# Altium PCB 8810.PcbDoc (part 2 of 2)
Units mm, origin at the board's own origin, x right, y up, seen from the top; angles counter-clockwise.
Board outline 295 x 220 mm, 2 copper layers (Top Layer, Bottom Layer); 156 components, 134 nets, 555 pads, 13 vias.
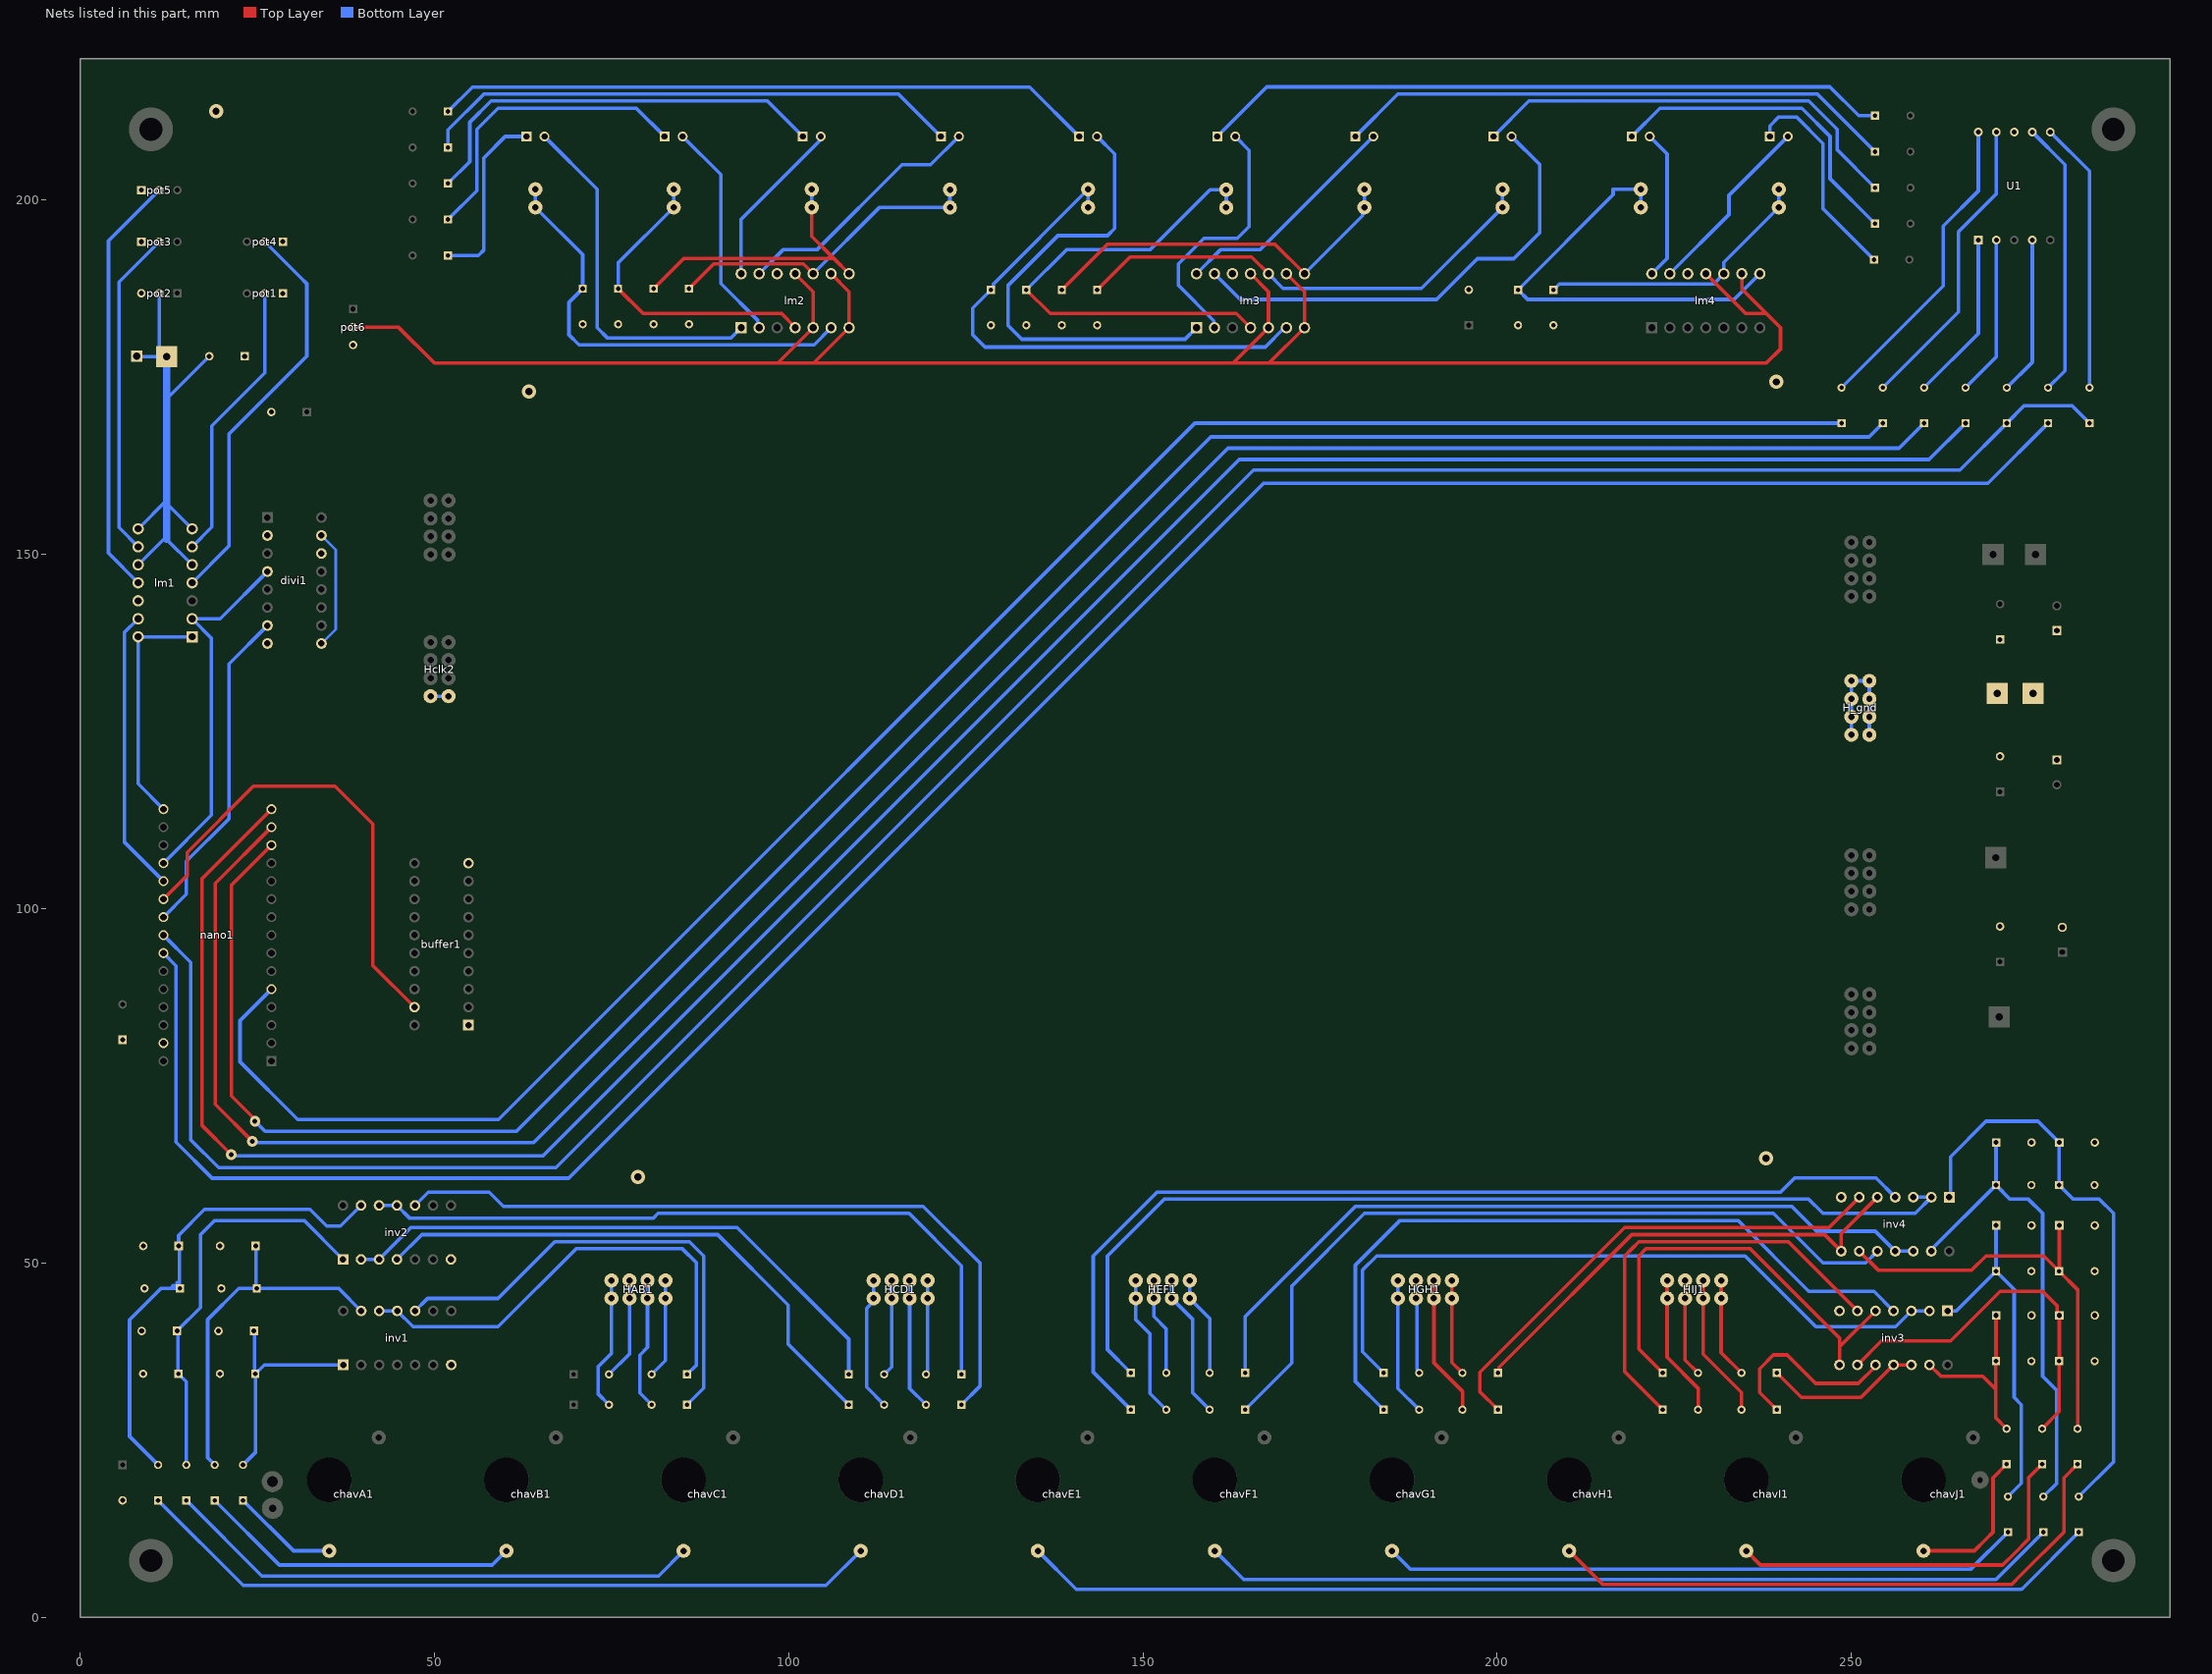
[diagram p2: the nets of this part, all layers, seen from the top]

## Via types
v1: diameter 1.5, hole 0.711, Top Layer to Bottom Layer, 8 vias
v2: diameter 2, hole 1, Top Layer to Bottom Layer, 5 vias

## Nets (pads, with @x,y where several pads share a name; then routed paths per layer and width w, separated by ;. In a path a pad name is that pad's centre, name@x,y a point inside that pad or via, vN(x,y) a via of type N, cw(c..) or ccw(c..) an arc to the next point about the centre after c; other vN are vias at no path point) (continued)
chaveB: inv1.10 R8.1 | length 67.6
  Bottom Layer w0.5: inv1.10@47.292,43.24 49.052,45 59,45 67,53 86,53 88,51 88,32.327 R8.1@85.661,29.988
chaveB/: inv1.11 inv1.12 R6.1 | length 67.4
  Bottom Layer w0.5: inv1.12@42.212,43.24 inv1.11@44.752,43.24 44.76,43.24 47,41 59,41 70,52 85,52 87,50 87,35.618 R6.1@85.661,34.279
chaveC: inv2.4 R12.1 | length 78.4
  Bottom Layer w0.5: inv2.4@44.726,50.501 48.225,54 90,54 99.928,44.072 99.928,38.545 R12.1@108.485,29.988
chaveC/: inv2.2 inv2.3 R10.1 | length 82.2
  Bottom Layer w0.5: inv2.2@39.646,50.501 inv2.3@42.186,50.501 46.685,55 92.731,55 108.485,39.246 R10.1@108.485,34.279
chaveD: inv2.10 R16.1 | length 105.7
  Bottom Layer w0.5: inv2.10@47.266,58.121 49.145,60 57.732,60 59.732,58 119,58 127,50 127,32.603 R16.1@124.385,29.988
chaveD/: inv2.11 inv2.12 R14.1 | length 101.6
  Bottom Layer w0.5: inv2.12@42.186,58.121 inv2.11@44.726,58.121 46.552,56.294 80.86,56.294 81.566,57 117,57 124.385,49.615 R14.1@124.385,34.279
chaveE: inv4.4 R20.1 | length 142.8
  Bottom Layer w0.5: R20.1@148.306,29.29 147.981,29.615 143,34.597 143,51 152,60 240,60 242,62 253.474,62 inv4.4@256.2,59.274
chaveE/: inv4.2 inv4.3 R18.1 | length 141.8
  Bottom Layer w0.5: R18.1@148.306,34.478 145,37.784 145,51 153,59 244,59 246,57 259.006,57 inv4.2@261.28,59.274 inv4.3@258.74,59.274
chaveF: inv4.10 R24.1 | length 110.6
  Bottom Layer w0.5: R24.1@164.425,29.29 171.022,35.887 171.022,46.729 181.293,57 239,57 246,50 252.006,50 inv4.10@253.66,51.654
chaveF/: inv4.11 inv4.12 R22.1 | length 111.3
  Bottom Layer w0.5: R22.1@164.425,34.478 164.425,42.425 180,58 241.598,58 245.105,54.493 253.362,54.493 inv4.11@256.2,51.654 inv4.12@258.74,51.654
chaveG: inv3.4 R28.1 | length 105.9
  Bottom Layer w0.5: R28.1@183.994,29.29 180,33.284 180,49.707 186.293,56 234,56 244,46 253.184,46 inv3.4@255.944,43.24
chaveG/: inv3.2 inv3.3 R26.1 | length 101.7
  Bottom Layer w0.5: R26.1@183.994,34.478 181,37.472 181,49 183,51 235,51 245,41 256.244,41 inv3.3@258.484,43.24 inv3.2@261.024,43.24
chaveH: inv4.6 R32.1 | length 70.1
  Top Layer w0.5: R32.1@200.113,29.29 197.579,31.824 197.579,34.579 218,55 245.962,55 245.982,55.021 246.867,55.021 inv4.6@251.12,59.274
chaveH/: inv4.5 inv4.8 R30.1 | length 67.6
  Top Layer w0.5: R30.1@200.113,34.478 200.259,34.625 200.259,35.259 202,37 219,54 246.234,54 inv4.8@248.58,51.654 248.58,54.194 inv4.5@253.66,59.274
chaveI: inv3.6 R36.1 | length 61.7
  Top Layer w0.5: R36.1@223.372,29.29 218,34.662 218,51 219,52 220,53 241.104,53 inv3.6@250.864,43.24
chaveI/: inv3.5 inv3.8 R34.1 | length 62.8
  Top Layer w0.5: R34.1@223.372,34.478 220,37.85 220,51 221,52 235.727,52 248.324,39.403 248.324,38.16 ; inv3.8@248.324,35.62 248.324,38.16 ; inv3.5@253.404,43.24 248.324,38.16
chaveJ: inv3.10 R40.1 | length 26.8
  Top Layer w0.5: R40.1@239.491,29.29 237.051,31.73 237.051,35.071 239.001,37.02 240.924,37.02 244.944,33 251,33 253.404,35.404 inv3.10@253.404,35.62
chaveJ/: inv3.11 inv3.12 R38.1 | length 22.3
  Top Layer w0.5: R38.1@239.491,34.478 242.943,31.026 251.351,31.026 inv3.11@255.944,35.62 inv3.12@258.484,35.62
gnd: buffer1.1 buffer1.10 C1.1 C2.1 C3.2 C4.1 C5.2 C6.2 C7.2 C8.2 C9.2 C10.2 C11.2 C12.2 C13.2 C14.2 C15.2 C16.2 C17.1 C18.2 C19.1 C20.2 C21.2 divi1.2 divi1.8 divi1.14 H_gnd.C1 H_gnd.C2 H_gnd.C3 H_gnd.C4 H_gnd.C5 H_gnd.C6 H_gnd.C7 H_gnd.C8 inv1.7 inv2.7 inv3.7 inv4.7 lm1.12 lm2.12 lm3.12 lm4.12 nano1.29 pin_gnd1.1 pin_gnd2.1 pot1.1 pot2.3 pot3.1 pot4.1 pot5.1 pot6.3 R1.2 R5.2 R9.2 R13.2 R17.2 R21.2 R25.2 R29.2 R33.2 R37.2 R48.2 R50.2 R52.2 R54.2 R56.2 R58.2 R60.2 R62.2 R64.2 R66.2 U1.8 | length 17.8
  Bottom Layer w0.5: H_gnd.C7@250,124.54 H_gnd.C5@250,127.08 H_gnd.C3@250,129.62 H_gnd.C1@250,132.16 H_gnd.C2@252.54,132.16 H_gnd.C4@252.54,129.62 H_gnd.C6@252.54,127.08 H_gnd.C8@252.54,124.54
  other v2: 78.744,62.144 237.948,64.779 63.36,172.994 239.41,174.362 19.196,212.572
NetC7_1: C7.1 inv1.1 R1.1 R3.2 | length 32.6
  Bottom Layer w0.5: R3.2@23,21.5 24.734,23.234 R1.1@24.734,34.362 ; C7.1@24.531,40.409 24.633,40.308 24.633,34.464 R1.1@24.734,34.362 ; inv1.1@37.132,35.62 25.992,35.62 R1.1@24.734,34.362
NetC8_1: C8.1 inv1.13 R5.1 R7.2 | length 51.8
  Bottom Layer w0.5: R7.2@19,21.5 18,22.5 18,42 22.414,46.414 R5.1@24.931,46.414 ; C8.1@24.763,52.4 24.847,52.316 24.847,46.498 R5.1@24.931,46.414 ; inv1.13@39.672,43.24 36.499,46.414 R5.1@24.931,46.414
NetC9_1: C9.1 inv2.1 R9.1 R11.2 | length 57.6
  Bottom Layer w0.5: R11.2@15,21.5 15,33.25 R9.1@13.888,34.362 13.787,34.464 13.787,40.308 C9.1@13.685,40.409 17,43.724 17,54 19,56 31.607,56 inv2.1@37.106,50.501
NetC10_1: C10.1 inv2.13 R13.1 R15.2 | length 70.7
  Bottom Layer w0.5: R15.2@11,21.5 6.981,25.519 6.981,41.981 11.414,46.414 12.787,46.414 ; 13.65,47.246 13.761,47.136 13.761,46.739 R13.1@14.086,46.414 ; inv2.13@39.646,58.121 36.732,55.207 34.793,55.207 32.452,57.548 17.548,57.548 13.917,53.917 C10.1@13.917,52.4 14.001,52.316 14.001,46.498 R13.1@14.086,46.414 ; 12.787,46.414 13.229,46.856 13.643,46.856 R13.1@14.086,46.414 ; 12.787,46.414 R13.1@14.086,46.414
NetC11_1: C11.1 inv4.1 R17.1 R19.2 | length 81.8
  Bottom Layer w0.5: inv4.1@263.82,59.274 264,59.454 264,65 269,70 276.354,70 C11.1@279.354,67 279.341,66.987 279.341,61.012 R17.1@279.329,61 281.329,59 285,59 287,57 287,21.914 R19.2@282.104,17.018
NetC12_1: C12.1 inv4.13 R21.1 R23.2 | length 69
  Bottom Layer w0.5: inv4.13@261.28,51.654 261.28,51.872 R21.1@270.409,61 ; C12.1@270.434,67 270.421,66.987 270.421,61.012 R21.1@270.409,61 ; R23.2@277.1,17.018 279,18.918 279,32 277,34 277,57 275,59 272.409,59 R21.1@270.409,61
NetC13_1: C13.1 inv3.1 R25.1 R27.2 | length 49.7
  Bottom Layer w0.5: inv3.1@263.564,43.24 264.807,43.24 R25.1@270.409,48.841 ; C13.1@270.434,55.307 270.421,55.294 270.421,48.854 R25.1@270.409,48.841 ; R27.2@272.095,17.018 274,18.922 274,30 272.976,31.024 272.976,46.274 R25.1@270.409,48.841
NetC14_1: C14.1 inv4.9 R29.1 R31.2 | length 60.8
  Top Layer w0.5: inv4.9@251.12,51.654 253.774,49 267,49 269,51 277.178,51 R29.1@279.337,48.841 ; C14.1@279.362,55.29 279.349,55.278 279.349,48.838 279.337,48.825 281.928,46.234 R31.2@281.928,26.6
NetC15_1: C15.1 inv3.9 R33.1 R35.2 | length 51.8
  Top Layer w0.5: inv3.9@250.864,35.62 254.244,39 264,39 271,46 277,46 279.047,43.953 279.047,42.918 C15.1@279.362,42.603 279.349,42.591 279.349,36.151 R33.1@279.337,36.138 279.337,29.013 R35.2@276.924,26.6
NetC16_1: C16.1 inv3.13 R37.1 R39.2 | length 27.5
  Top Layer w0.5: inv3.13@261.024,35.62 262.644,34 268.533,34 270.409,32.124 ; C16.1@270.434,42.603 270.421,42.591 270.421,36.151 R37.1@270.409,36.138 270.409,32.124 ; R39.2@271.919,26.6 270.409,28.111 270.409,32.124
NetC17_2: C17.2 lm1.5 lm1.7 lm1.8 lm1.10 pot2.2 probe1.1 probe2.1 | length 69
  Bottom Layer w0.5: lm1.10@8.19,148.54 12.228,152.578 ; lm1.8@8.19,153.62 12.228,157.658 ; probe2.1@8.426,177.87 8.483,177.926 probe1.1@12.228,177.926 11.18,178.974 pot2.2@11.18,186.864 ; 12.228,152.122 lm1.5@15.81,148.54 ; 12.228,157.202 lm1.7@15.81,153.62 ; 12.228,171.978 C17.2@18.23,177.98
  Bottom Layer w1: 12.228,152.122 12.228,152.578 12.228,157.202 12.228,157.658 12.228,171.978 probe1.1@12.228,177.926
NetchavA1_1: chavA1.C2 R3.1 | length 15.1
  Bottom Layer w0.5: R3.1@23,16.5 30.128,9.372 chavA1.C2@35.168,9.372
NetchavB1_1: chavB1.C2 R7.1 | length 45.8
  Bottom Layer w0.5: R7.1@19,16.5 28.128,7.372 58.168,7.372 chavB1.C2@60.168,9.372
NetchavC1_1: chavC1.C2 R11.1 | length 76.1
  Bottom Layer w0.5: R11.1@15,16.5 15.325,16.175 25.673,5.827 81.623,5.827 chavC1.C2@85.168,9.372
NetchavD1_1: chavD1.C2 R15.1 | length 106.2
  Bottom Layer w0.5: R15.1@11,16.5 23.016,4.484 105.28,4.484 chavD1.C2@110.168,9.372
NetchavE1_1: chavE1.C2 R19.1 | length 152.5
  Bottom Layer w0.5: chavE1.C2@135.168,9.372 140.616,3.924 274.01,3.924 274.46,4.374 R19.1@282.104,12.018
NetchavF1_1: chavF1.C2 R23.1 | length 121.4
  Bottom Layer w0.5: chavF1.C2@160.168,9.372 164.214,5.326 270.408,5.326 R23.1@277.1,12.018
NetchavG1_1: chavG1.C2 R27.1 | length 90.2
  Bottom Layer w0.5: chavG1.C2@185.168,9.372 187.738,6.802 266.88,6.802 R27.1@272.095,12.018
NetchavH1_1: chavH1.C2 R31.1 | length 85.2
  Top Layer w0.5: chavH1.C2@210.168,9.372 214.908,4.632 272.632,4.632 274,6 280,12 280,19.672 R31.1@281.928,21.6
NetchavI1_1: chavI1.C2 R35.1 | length 53.6
  Top Layer w0.5: chavI1.C2@235.168,9.372 237.168,7.372 271.372,7.372 273,9 275,11 275,19.676 R35.1@276.924,21.6
NetchavJ1_1: chavJ1.C2 R39.1 | length 21.3
  Top Layer w0.5: chavJ1.C2@260.168,9.372 267.372,9.372 269,11 270,12 270,19.681 R39.1@271.919,21.6
Netdivi1_9: divi1.9 divi1.15 | length 16.9
  Bottom Layer w0.4: divi1.9@34.063,137.435 36.076,139.448 36.076,150.663 divi1.15@34.063,152.675
NetH_LED1_1: H_LED1.C1 H_LED1.C2 lm2.6 R48.1 | length 62.7
  Bottom Layer w0.5: H_LED1.C1@64.27,201.54 H_LED1.C2@64.27,199 70.939,192.331 R48.1@70.939,187.509 69,185.57 69,181.01 70.416,179.594 103.594,179.594 lm2.6@106,182
NetH_LED2_1: H_LED2.C1 H_LED2.C2 lm2.4 R50.1 | length 44.6
  Top Layer w0.5: R50.1@75.939,187.509 79.448,184 99,184 100.92,182.08 lm2.4@100.92,182
  Bottom Layer w0.5: R50.1@75.939,187.509 75.939,191.169 H_LED2.C2@83.77,199 H_LED2.C1@83.77,201.54
NetH_LED3_1: H_LED3.C1 H_LED3.C2 lm2.8 R52.1 | length 41.3
  Top Layer w0.5: R52.1@80.939,187.509 85.184,191.754 106.406,191.754 ; H_LED3.C2@103.27,199 103.27,194.89 106.406,191.754 ; lm2.8@108.54,189.62 106.406,191.754
  Bottom Layer w0.5: H_LED3.C2@103.27,199 H_LED3.C1@103.27,201.54
NetH_LED4_1: H_LED4.C1 H_LED4.C2 lm2.10 R54.1 | length 45.3
  Top Layer w0.5: R54.1@85.939,187.509 89.43,191 102.08,191 lm2.10@103.46,189.62
  Bottom Layer w0.5: lm2.10@103.46,189.62 112.8,198.96 H_LED4.C2@122.77,198.96 H_LED4.C1@122.77,201.5
NetH_LED5_1: H_LED5.C1 H_LED5.C2 lm3.6 R56.1 | length 75.9
  Bottom Layer w0.5: H_LED5.C2@142.27,199 H_LED5.C1@142.27,201.54 128.884,188.154 128.884,187.682 R56.1@128.559,187.357 126,184.798 126,181 127.727,179.273 167.273,179.273 170,182 lm3.6@170.27,182
NetH_LED6_1: H_LED6.C1 H_LED6.C2 lm3.4 R58.1 | length 70.5
  Top Layer w0.5: R58.1@133.559,187.357 136.916,184 163.19,184 lm3.4@165.19,182
  Bottom Layer w0.5: R58.1@133.559,187.357 139.202,193 151,193 159.5,201.5 H_LED6.C1@161.77,201.5 H_LED6.C2@161.77,198.96
NetH_LED7_1: H_LED7.C1 H_LED7.C2 lm3.8 R60.1 | length 54.1
  Top Layer w0.5: R60.1@138.559,187.357 145,193.798 168.632,193.798 lm3.8@172.81,189.62 ; H_LED7.C2@180.983,198.713 H_LED7.C2@181.27,199
  Bottom Layer w0.5: lm3.8@172.81,189.62 180.983,197.793 H_LED7.C2@180.983,198.713 ; H_LED7.C2@181.27,199 H_LED7.C1@181.27,201.54
NetH_LED8_1: H_LED8.C1 H_LED8.C2 lm3.10 R62.1 | length 68.3
  Top Layer w0.5: R62.1@143.559,187.357 143.884,187.682 148.202,192 165.35,192 lm3.10@167.73,189.62
  Bottom Layer w0.5: lm3.10@167.73,189.62 169.788,187.562 189.332,187.562 H_LED8.C2@200.77,199 H_LED8.C1@200.77,201.54
NetH_LED9_1: H_LED9.C1 H_LED9.C2 lm4.8 R64.1 | length 62.4
  Bottom Layer w0.5: H_LED9.C2@220.27,199 H_LED9.C1@220.27,201.54 216.365,201.54 216.365,200.773 R64.1@202.949,187.357 204.306,186 233.46,186 lm4.8@237.08,189.62
NetH_LED10_1: H_LED10.C1 H_LED10.C2 lm4.10 R66.1 | length 40.1
  Bottom Layer w0.5: R66.1@207.949,187.357 208.783,188.192 230.572,188.192 lm4.10@232,189.62 232,191.23 H_LED10.C2@239.77,199 H_LED10.C1@239.77,201.54
NetHAB1_1: HAB1.C1 HAB1.C2 R4.2 | length 19
  Bottom Layer w0.5: R4.2@74.652,29.988 73.093,31.547 73.093,35.314 75,37.221 HAB1.C1@75,45 HAB1.C2@75,47.54
NetHAB1_3: HAB1.C3 HAB1.C4 R2.2 | length 14.5
  Bottom Layer w0.5: R2.2@74.652,34.279 77.54,37.167 HAB1.C3@77.54,45 HAB1.C4@77.54,47.54
NetHAB1_5: HAB1.C5 HAB1.C6 R8.2 | length 18.7
  Bottom Layer w0.5: HAB1.C6@80.08,47.54 HAB1.C5@80.08,45 80.08,38.08 79,37 79,31.649 R8.2@80.661,29.988
NetHAB1_7: HAB1.C7 HAB1.C8 R6.2 | length 14.1
  Bottom Layer w0.5: R6.2@80.661,34.279 82.62,36.238 HAB1.C7@82.62,45 HAB1.C8@82.62,47.54
NetHCD1_1: HCD1.C1 HCD1.C2 R12.2 | length 19
  Bottom Layer w0.5: HCD1.C2@112,47.54 HCD1.C1@112,45 112,44.594 111,43.594 111,32.473 R12.2@113.485,29.988
NetHCD1_3: HCD1.C3 HCD1.C4 R10.2 | length 13.7
  Bottom Layer w0.5: R10.2@113.485,34.279 114.54,35.334 HCD1.C3@114.54,45 HCD1.C4@114.54,47.54
NetHCD1_5: HCD1.C5 HCD1.C6 R16.2 | length 18.5
  Bottom Layer w0.5: HCD1.C6@117.08,47.54 HCD1.C5@117.08,45 117.08,32.293 R16.2@119.385,29.988
NetHCD1_7: HCD1.C7 HCD1.C8 R14.2 | length 13.4
  Bottom Layer w0.5: R14.2@119.385,34.279 119.385,34.455 119.62,34.69 HCD1.C7@119.62,45 HCD1.C8@119.62,47.54
NetHclk2_7: Hclk2.C7 Hclk2.C8 | length 2.5
  Bottom Layer w0.5: Hclk2.C7@49.46,130 Hclk2.C8@52,130
NetHEF1_1: HEF1.C1 HEF1.C2 R20.2 | length 20
  Bottom Layer w0.5: HEF1.C2@149,47.54 HEF1.C1@149,45 149,42 151,40 151,31.597 R20.2@153.306,29.29
NetHEF1_3: HEF1.C3 HEF1.C4 R18.2 | length 13.8
  Bottom Layer w0.5: HEF1.C4@151.54,47.54 HEF1.C3@151.54,45 151.54,42.46 153.306,40.694 R18.2@153.306,34.478
NetHEF1_5: HEF1.C5 HEF1.C6 R24.2 | length 20.5
  Bottom Layer w0.5: HEF1.C6@154.08,47.54 HEF1.C5@154.08,45 157,42.08 157,31.716 R24.2@159.425,29.29
NetHEF1_7: HEF1.C7 HEF1.C8 R22.2 | length 14.2
  Bottom Layer w0.5: HEF1.C8@156.62,47.54 HEF1.C7@156.62,45 159.425,42.195 R22.2@159.425,34.478
NetHGH1_1: HGH1.C1 HGH1.C2 R28.2 | length 19.5
  Bottom Layer w0.5: HGH1.C2@186,47.54 HGH1.C1@186,45 186,32.284 R28.2@188.994,29.29
NetHGH1_3: HGH1.C3 HGH1.C4 R26.2 | length 13.6
  Bottom Layer w0.5: HGH1.C4@188.54,47.54 HGH1.C3@188.54,45 ; HGH1.C3@188.75,44.79 HGH1.C3@188.54,45 ; R26.2@189,34.484 R26.2@188.994,34.478 188.994,34.654 188.682,34.967 188.682,44.858 HGH1.C3@188.54,45
NetHGH1_5: HGH1.C5 HGH1.C6 R32.2 | length 19.9
  Top Layer w0.5: HGH1.C6@191.08,47.54 HGH1.C5@191.08,45 191.08,35.92 195.113,31.887 R32.2@195.113,29.29
NetHGH1_7: HGH1.C7 HGH1.C8 R30.2 | length 13.7
  Top Layer w0.5: HGH1.C8@193.62,47.54 HGH1.C7@193.62,45 193.62,35.971 R30.2@195.113,34.478
NetHIJ1_1: HIJ1.C1 HIJ1.C2 R36.2 | length 20.1
  Top Layer w0.5: HIJ1.C2@224,47.54 HIJ1.C1@224,45 224,36.698 228.372,32.327 R36.2@228.372,29.29
NetHIJ1_3: HIJ1.C3 HIJ1.C4 R34.2 | length 13.8
  Top Layer w0.5: HIJ1.C4@226.54,47.54 HIJ1.C3@226.54,45 226.54,36.31 R34.2@228.372,34.478
NetHIJ1_5: HIJ1.C5 HIJ1.C6 R40.2 | length 20.5
  Top Layer w0.5: HIJ1.C6@229.08,47.54 HIJ1.C5@229.08,45 229.08,37.129 234.491,31.718 R40.2@234.491,29.29
NetHIJ1_7: HIJ1.C7 HIJ1.C8 R38.2 | length 14.3
  Top Layer w0.5: HIJ1.C8@231.62,47.54 HIJ1.C7@231.62,45 231.62,37.349 R38.2@234.491,34.478
NetLED1_1: LED1.1 R49.1 | length 25.6
  Bottom Layer w0.5: R49.1@51.938,192.206 56.206,192.206 57,193 57,206 60,209 LED1.1@63,209
NetLED1_2: LED1.2 lm2.1 | length 51.6
  Bottom Layer w0.5: LED1.2@65.54,209 73,201.54 73,182 74.467,180.533 91.833,180.533 lm2.1@93.3,182
NetLED2_1: LED2.1 R51.1 | length 43.8
  Bottom Layer w0.5: R51.1@51.938,197.284 56,201.346 56,210 59,213 78.5,213 LED2.1@82.5,209
NetLED2_2: LED2.2 lm2.2 | length 31.5
  Bottom Layer w0.5: LED2.2@85.04,209 90.421,203.619 90.421,188.251 95.66,183.012 95.66,182.18 lm2.2@95.84,182
NetLED3_1: LED3.1 R53.1 | length 60.2
  Bottom Layer w0.5: R53.1@51.938,202.362 55,205.424 55,211 58,214 97,214 LED3.1@102,209
NetLED3_2: LED3.2 lm2.14 | length 24
  Bottom Layer w0.5: lm2.14@93.3,189.62 93.3,197.3 104.368,208.368 104.368,208.828 LED3.2@104.54,209
NetLED4_1: LED4.1 R55.1 | length 76.6
  Bottom Layer w0.5: R55.1@51.938,207.44 51.938,209.938 57,215 115.5,215 LED4.1@121.5,209
NetLED4_2: LED4.2 lm2.13 | length 36.2
  Bottom Layer w0.5: lm2.13@95.84,189.62 99.22,193 104,193 116,205 120.04,205 LED4.2@124.04,209
NetLED5_1: LED5.1 R57.1 | length 93.4
  Bottom Layer w0.5: R57.1@51.938,212.518 55.388,215.968 134.032,215.968 LED5.1@141,209
NetLED5_2: LED5.2 lm3.1 | length 66.1
  Bottom Layer w0.5: LED5.2@143.54,209 146,206.54 146,196 145,195 138,195 131,188 131,182.293 132.914,180.379 155.949,180.379 lm3.1@157.57,182
NetLED6_1: LED6.1 R59.1 | length 97.4
  Bottom Layer w0.5: LED6.1@160.5,209 167.5,216 246.974,216 251.047,211.927 R59.1@253.347,211.927
NetLED6_2: LED6.2 lm3.2 | length 36.8
  Bottom Layer w0.5: lm3.2@160.11,182 160,182.11 160,183 155,188 155,191 158.638,194.638 163.338,194.638 165,196.3 165,207.04 LED6.2@163.04,209
NetLED7_1: LED7.1 R61.1 | length 79.2
  Bottom Layer w0.5: LED7.1@180,209 186,215 245.196,215 R61.1@253.347,206.849
NetLED7_2: LED7.2 lm3.14 | length 33
  Bottom Layer w0.5: lm3.14@157.57,189.62 160.95,193 166.54,193 LED7.2@182.54,209
NetLED8_1: LED8.1 R63.1 | length 62.7
  Bottom Layer w0.5: LED8.1@199.5,209 204.5,214 244,214 248,210 248,207.118 R63.1@253.347,201.771
NetLED8_2: LED8.2 lm3.13 | length 66.5
  Bottom Layer w0.5: lm3.13@160.11,189.62 163.733,185.997 191.482,185.997 197.228,191.743 202.34,191.743 206,195.403 206,205.04 LED8.2@202.04,209
NetLED9_1: LED9.1 R65.1 | length 46.2
  Bottom Layer w0.5: LED9.1@219,209 223,213 243,213 247,209 247,203.04 R65.1@253.347,196.693
NetLED9_2: LED9.2 lm4.14 | length 21.3
  Bottom Layer w0.5: LED9.2@221.54,209 224,206.54 224,191.78 lm4.14@221.84,189.62
NetLED10_1: LED10.1 R67.1 | length 30.4
  Bottom Layer w0.5: LED10.1@238.5,209 238.5,210.5 239.76,211.76 242.24,211.76 246,208 246,198.801 R67.1@253.186,191.615
NetLED10_2: LED10.2 lm4.13 | length 26.3
  Bottom Layer w0.5: lm4.13@224.38,189.62 232.729,197.969 232.729,200.689 LED10.2@241.04,209
Netlm1_4: lm1.4 pot4.2 | length 57.3
  Bottom Layer w0.5: lm1.4@15.81,146 20.99,151.18 20.99,165.99 20.99,166.99 32,178 32,188.223 31,189.223 pot4.2@26.085,194.139
Netlm1_6: lm1.6 pot1.2 | length 40
  Bottom Layer w0.5: lm1.6@15.81,151.08 18.594,153.864 18.594,168.133 26.085,175.624 pot1.2@26.085,186.844
Netlm1_9: lm1.9 pot3.2 | length 46.5
  Bottom Layer w0.5: lm1.9@8.19,151.08 5.48,153.79 5.48,188.438 pot3.2@11.18,194.138
Netlm1_11: lm1.11 pot5.2 | length 60.1
  Bottom Layer w0.5: lm1.11@8.19,146 4,150.19 4,194.253 pot5.2@11.18,201.433
Netlm2_5: lm2.5 lm2.7 lm2.9 lm2.11 lm3.5 lm3.7 lm3.9 lm3.11 lm4.9 lm4.11 pot6.2 | length 291.1
  Top Layer w0.5: pot6.2@38.522,182.102 44.898,182.102 50,177 98.46,177 ; lm2.11@100.92,189.62 103.46,187.08 lm2.5@103.46,182 98.46,177 ; lm2.9@106,189.62 108.54,187.08 lm2.7@108.54,182 103.54,177 ; lm3.11@165.19,189.62 167.73,187.08 lm3.5@167.73,182 162.73,177 ; lm3.9@170.27,189.62 172.81,187.08 lm3.7@172.81,182 167.81,177 ; lm4.11@229.46,189.62 235.08,184 238,184 ; lm4.9@234.54,189.62 234.54,187.46 238,184 ; 98.46,177 103.54,177 ; 103.54,177 162.73,177 ; 162.73,177 167.81,177 ; 167.81,177 238,177 240,179 240,182 238,184
NetR41_2: R41.2 U1.7 | length 39
  Bottom Layer w0.5: U1.7@275.54,209.62 280.147,205.013 280.147,175.912 R41.2@277.774,173.538
NetR42_2: R42.2 U1.6 | length 38.4
  Bottom Layer w0.5: U1.6@278.08,209.62 283.608,204.092 R42.2@283.608,173.538
NetR43_2: R43.2 U1.4 | length 22.3
  Bottom Layer w0.5: R43.2@271.941,173.538 275.54,177.138 U1.4@275.54,194.38
NetR44_2: R44.2 U1.2 | length 22.6
  Bottom Layer w0.5: R44.2@266.107,173.538 270.46,177.891 U1.2@270.46,194.38
NetR45_2: R45.2 U1.1 | length 24
  Bottom Layer w0.5: R45.2@260.274,173.538 267.92,181.184 U1.1@267.92,194.38
NetR46_2: R46.2 U1.9 | length 42.7
  Bottom Layer w0.5: R46.2@254.441,173.538 265.127,184.225 265.127,195.546 270.46,200.879 U1.9@270.46,209.62
NetR47_2: R47.2 U1.10 | length 44.1
  Bottom Layer w0.5: R47.2@248.607,173.538 262.97,187.901 262.97,196.345 267.92,201.295 U1.10@267.92,209.62
Oe: buffer1.19 nano1.21 | length 68.5
  Top Layer w0.5: nano1.21@11.765,101.35 15.134,104.719 15.134,107.96 24.456,117.282 35.998,117.282 41.337,111.942 41.337,91.963 buffer1.19@47.19,86.11
pin_F: lm1.1 lm1.14 nano1.16 | length 33.4
  Bottom Layer w0.5: nano1.16@11.765,114.05 8.19,117.625 lm1.14@8.19,138.38 lm1.1@15.81,138.38
pin_Freq: divi1.7 nano1.22 | length 47.2
  Bottom Layer w0.5: nano1.22@11.765,98.81 15,102.045 15,106.699 21,112.699 21,134.532 divi1.7@26.443,139.975
pin_High: divi1.4 lm1.2 nano1.19 | length 51.8
  Bottom Layer w0.5: nano1.19@11.765,106.43 18.536,113.201 18.536,138.194 lm1.2@15.81,140.92 19.768,140.92 divi1.4@26.443,147.595
pin_Low: lm1.13 nano1.20 | length 40.1
  Bottom Layer w0.5: lm1.13@8.19,140.92 6.233,138.963 6.233,109.423 nano1.20@11.765,103.89
segA: nano1.24 R41.1 | length 337.9
  Bottom Layer w0.5: nano1.24@11.765,93.73 13.545,91.951 13.545,67.041 18.613,61.973 68.973,61.973 167.034,160.034 269.27,160.034 R41.1@277.774,168.538
segBC: nano1.23 R42.1 R43.1 | length 345.7
  Bottom Layer w0.5: nano1.23@11.765,96.27 15.631,92.405 15.631,67.377 19.567,63.441 67.157,63.441 165.628,161.912 265.315,161.912 R43.1@271.941,168.538 274.416,171.014 281.133,171.014 R42.1@283.608,168.538
segD: nano1.15 R44.1 | length 342.2
  Top Layer w0.5: v1(21.306,65.316) 17.229,69.393 17.229,104.274 nano1.15@27.005,114.05
  Bottom Layer w0.5: v1(21.306,65.316) 21.497,65.125 22.075,65.125 22.1,65.1 65.296,65.1 163.602,163.406 260.975,163.406 R44.1@266.107,168.538
segE: nano1.14 R45.1 | length 327.9
  Top Layer w0.5: v1(24.316,67.152) 19.069,72.399 19.069,103.574 nano1.14@27.005,111.51
  Bottom Layer w0.5: v1(24.316,67.152) 24.468,67 64,67 162,165 256.736,165 R45.1@260.274,168.538
segF: nano1.13 R46.1 | length 314.4
  Top Layer w0.5: v1(24.677,70.014) 24.677,70.268 21.367,73.578 21.367,103.332 nano1.13@27.005,108.97
  Bottom Layer w0.5: v1(24.677,70.014) 26.116,68.576 61.576,68.576 159.598,166.598 252.5,166.598 R46.1@254.441,168.538
segG: nano1.5 R47.1 | length 282.2
  Bottom Layer w0.5: nano1.5@27.005,88.65 22.567,84.212 22.567,78.381 30.712,70.236 59.048,70.236 157.351,168.538 R47.1@248.607,168.538
pads on no net: buffer1.3 buffer1.17 chavA1.C1 chavB1.C1 chavC1.C1 chavD1.C1 chavE1.C1 chavF1.C1 chavG1.C1 chavH1.C1 chavI1.C1 chavJ1.C1 divi1.1 divi1.3 divi1.5 divi1.6 divi1.10 divi1.11 inv1.5 inv1.6 inv1.8 inv1.9 inv2.5 inv2.6 inv2.8 inv2.9 lm4.1 lm4.2 lm4.4 lm4.5 lm4.6 lm4.7 nano1.1 nano1.2 nano1.3 nano1.4 nano1.17 nano1.18 nano1.25 nano1.26 nano1.28 nano1.30 U1.3 U1.5

## Polygon pours and split planes (outlines as drawn)
gnd on Bottom Layer "solid" (solid, pour order 5): 0,0 295,0 295,220 0,220
no net on Bottom Layer "NONET_L02_P000" (solid, pour order 0): 14.086,46.414 14.001,46.498 14.086,46.414
gnd on Top Layer "solid2" (solid, pour order 6): 0,0 295,0 295,220 0,220

## Other copper
Bottom Layer:
  region net NetC10_1: 14.086,46.414 14.001,46.498 14.001,49.368 11.054,46.407
  region net 5V: 255.15,146.821 257.985,149.656 257.985,150.004 254.877,153.111
  region net 5V: 284.721,149.945 293.99,140.676 293.99,157.564
  region net 5V: 254.958,154.361 247.409,154.361 247.409,141.653 254.768,141.653 254.85,141.735
  region net -12V: 255.135,90.539 255.135,87.963 258.321,84.777 255.56,82.016 254.99,82.016
  region net 12V: 255.082,109.904 257.978,107.008 255.131,104.161
  region net -12V: 255.135,90.539 247.532,90.539 247.449,90.622 247.201,90.374 247.201,77.812 254.942,77.812 255.107,77.647
  region net 12V: 255.177,110.147 255.149,110.119 247.402,110.119 247.402,97.378 247.43,97.349 247.458,97.378 255.092,97.378
  region net NetC8_1: 22.083,46.414 24.831,49.162 24.831,46.514 24.931,46.414

## Silkscreen, mask and mechanical layers (free items; w line width, h text height)
Top Overlay:
  drawing of 52 lines, arcs and shapes, not listed
  text "G.S" at 31.452,200.536 h4 r24.03
  text "A.D" at 35.244,198.844 h4 r24.03
  text "LEDS DE MONITORAÇÃO" at 60.312,191.513 h3
  text "FREQUÊNCIAS" at 41.789,164.03 h2.8
  text "Htz" at 41.907,160.671 h1
  text "100K" at 41.953,157.027 h1
  text "10K" at 41.953,154.481 h1
  text "1K" at 41.953,151.936 h1
  text "100" at 41.953,149.39 h1
  text "100K" at 41.953,137.03 h1
  text "10K" at 41.953,134.485 h1
  text "1K" at 41.953,131.939 h1
  text "FONTES" at 246.455,116.61 h2.8
  text "NÍVEIS" at 128,48.036 h3
  text "LÓGICOS" at 128,45.036 h3
  text "_" at 119.149,41.694 h3
  text "_" at 226.041,41.697 h3
  text "_" at 77.021,41.693 h3
  text "_" at 82.132,41.693 h3
  text "_" at 114.039,41.693 h3
  text "_" at 151.072,41.693 h3
  text "_" at 156.24,41.686 h3
  text "_" at 188.176,41.693 h3
  text "_" at 193.231,41.693 h3
  text "_" at 231.292,41.693 h3
  text "C" at 111.391,39.155 h3
  text "C" at 113.94,39.155 h3
  text "G" at 185.27,39.163 h3
  text "G" at 188.112,39.155 h3
  text "J" at 228.674,39.155 h3
  text "J" at 231.27,39.155 h3
  text "A" at 74.239,39.122 h3
  text "A" at 76.92,39.122 h3
  text "B" at 79.567,39.122 h3
  text "B" at 82.096,39.122 h3
  text "D" at 116.547,39.122 h3
  text "D" at 119.096,39.122 h3
  text "E" at 148.467,39.122 h3
  text "E" at 151.03,39.122 h3
  text "F" at 153.618,39.122 h3
  text "F" at 156.182,39.122 h3
  text "H" at 190.645,39.122 h3
  text "H" at 193.194,39.122 h3
  text "I" at 223.843,39.122 h3
  text "I" at 226.439,39.122 h3
  text "1" at 109.738,24.579 h2
  text "1" at 134.764,24.579 h2
  text "1" at 34.657,24.55 h2
  text "1" at 59.759,24.55 h2
  text "1" at 84.733,24.55 h2
  text "1" at 159.674,24.55 h2
  text "1" at 184.71,24.55 h2
  text "1" at 209.517,24.55 h2
  text "1" at 234.688,24.55 h2
  text "1" at 259.77,24.55 h2
  text "0" at 259.77,13.547 h2
  text "0" at 84.797,12.343 h2
  text "0" at 59.71,12.222 h2
  text "0" at 34.704,12.141 h2
  text "0" at 109.762,12.06 h2
  text "0" at 134.764,12.06 h2
  text "0" at 159.674,12.06 h2
  text "0" at 184.71,12.06 h2
  text "0" at 209.517,12.06 h2
  text "0" at 234.688,12.06 h2
  text "CHAVES DE SELEÇÃO" at 133.776,1.658 h4
Bottom Overlay:
  drawing of 7 lines, arcs and shapes, not listed
  text "Feito Pro:" at 185.972,71.159 h2
  text "Gustavo seabra / Arthur Damasceno" at 185.363,64.261 h4
Board Outline:
  the board outline again, w0.5